# Altium PCB Biological Payload Data Consolidator.PcbDoc
Units mil, origin at the board's own origin, x right, y up, seen from the top; angles counter-clockwise.
Board outline 2500 x 2500 mil, 2 copper layers (Top Layer, Bottom Layer); 56 components, 41 nets, 213 pads, 128 vias.
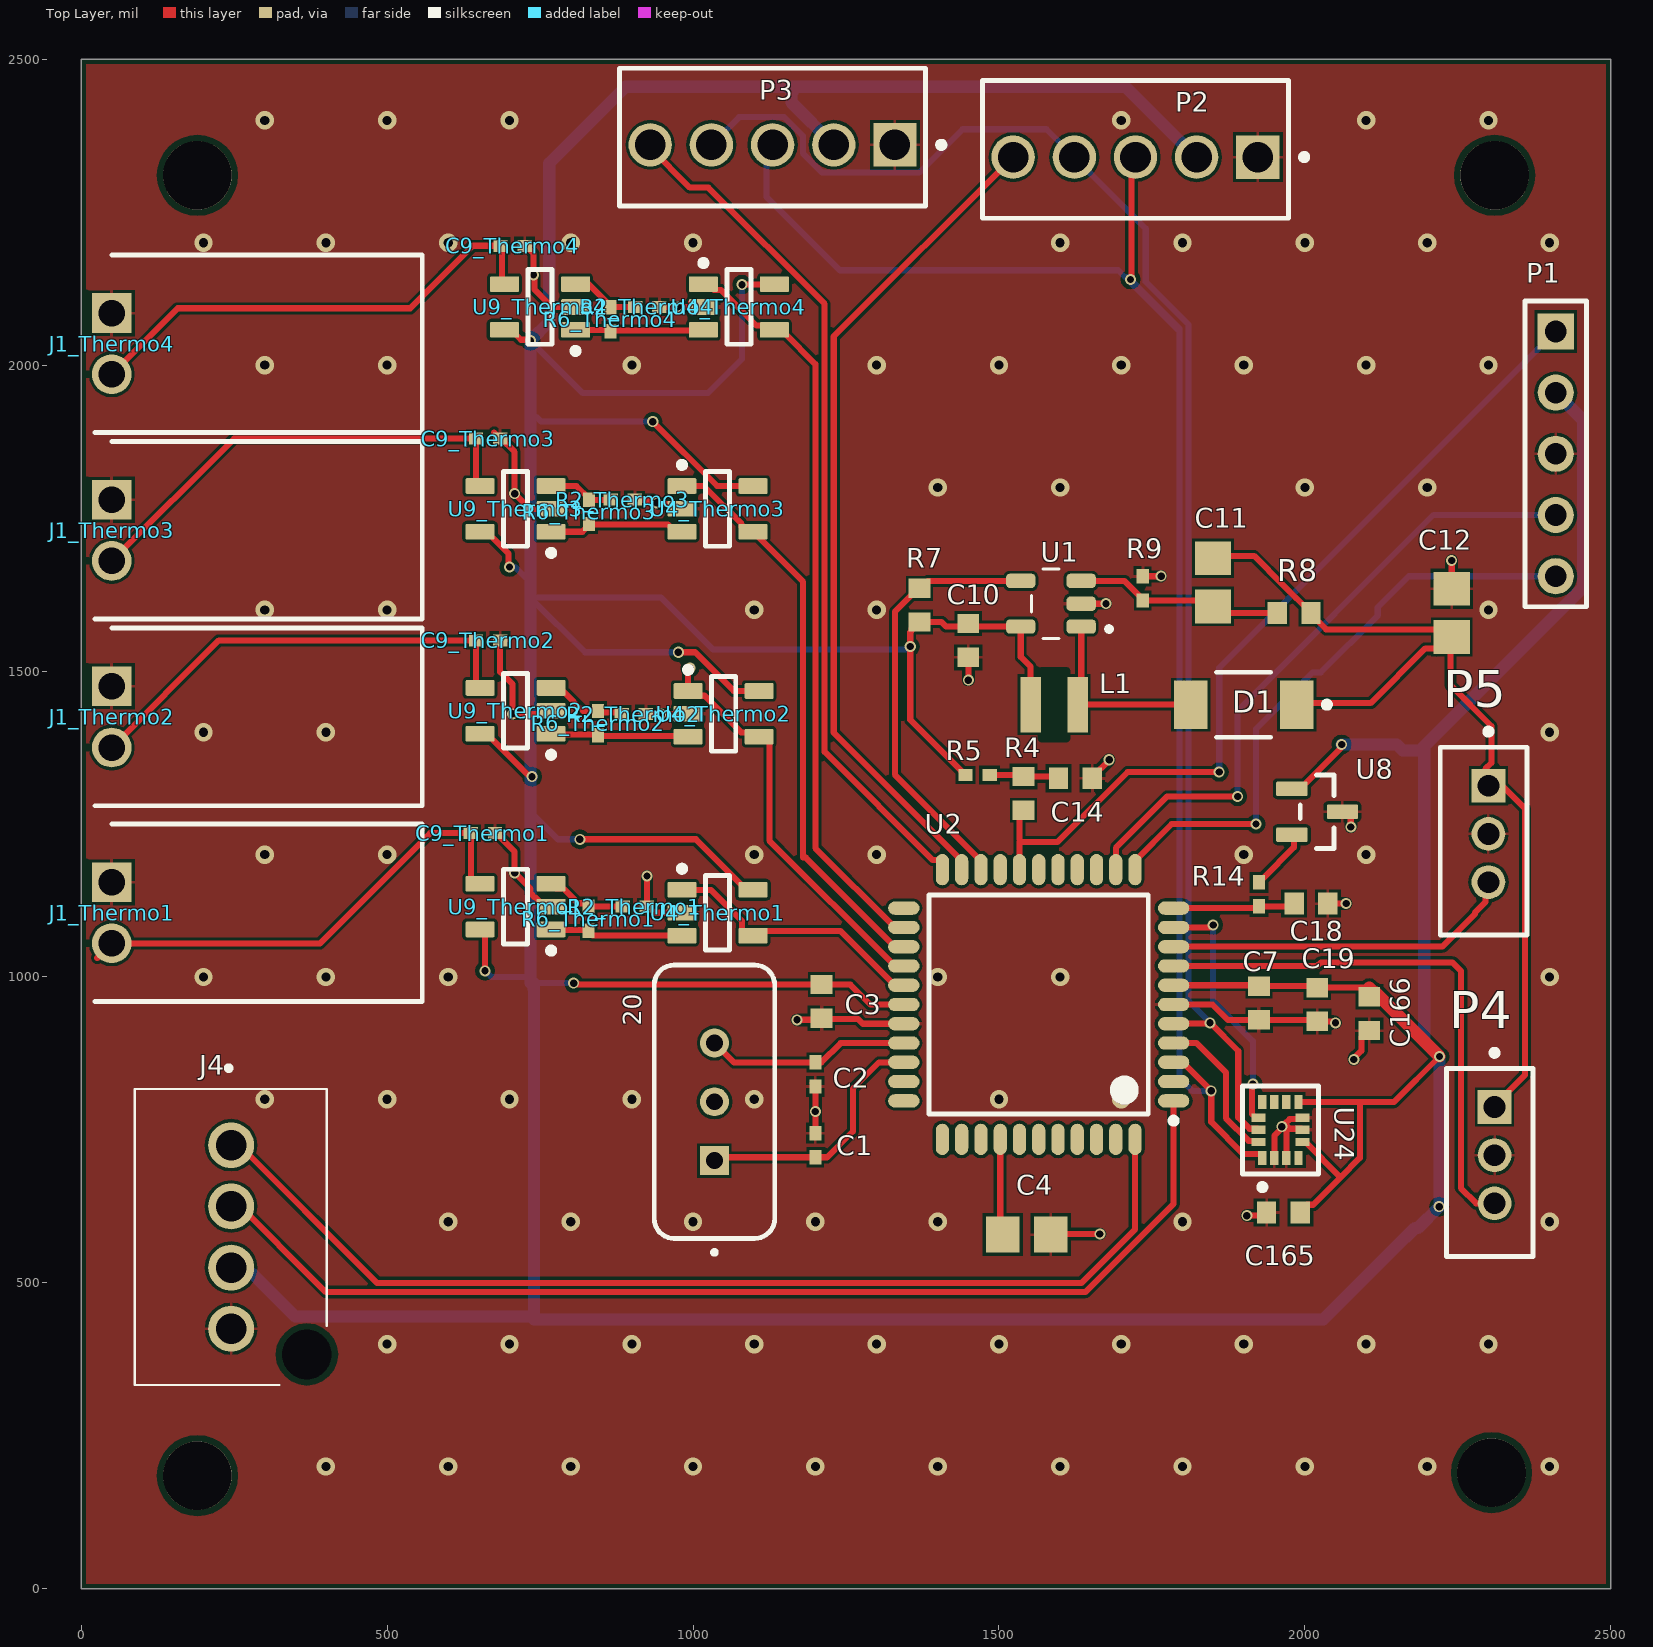
[diagram p0: Top Layer view]
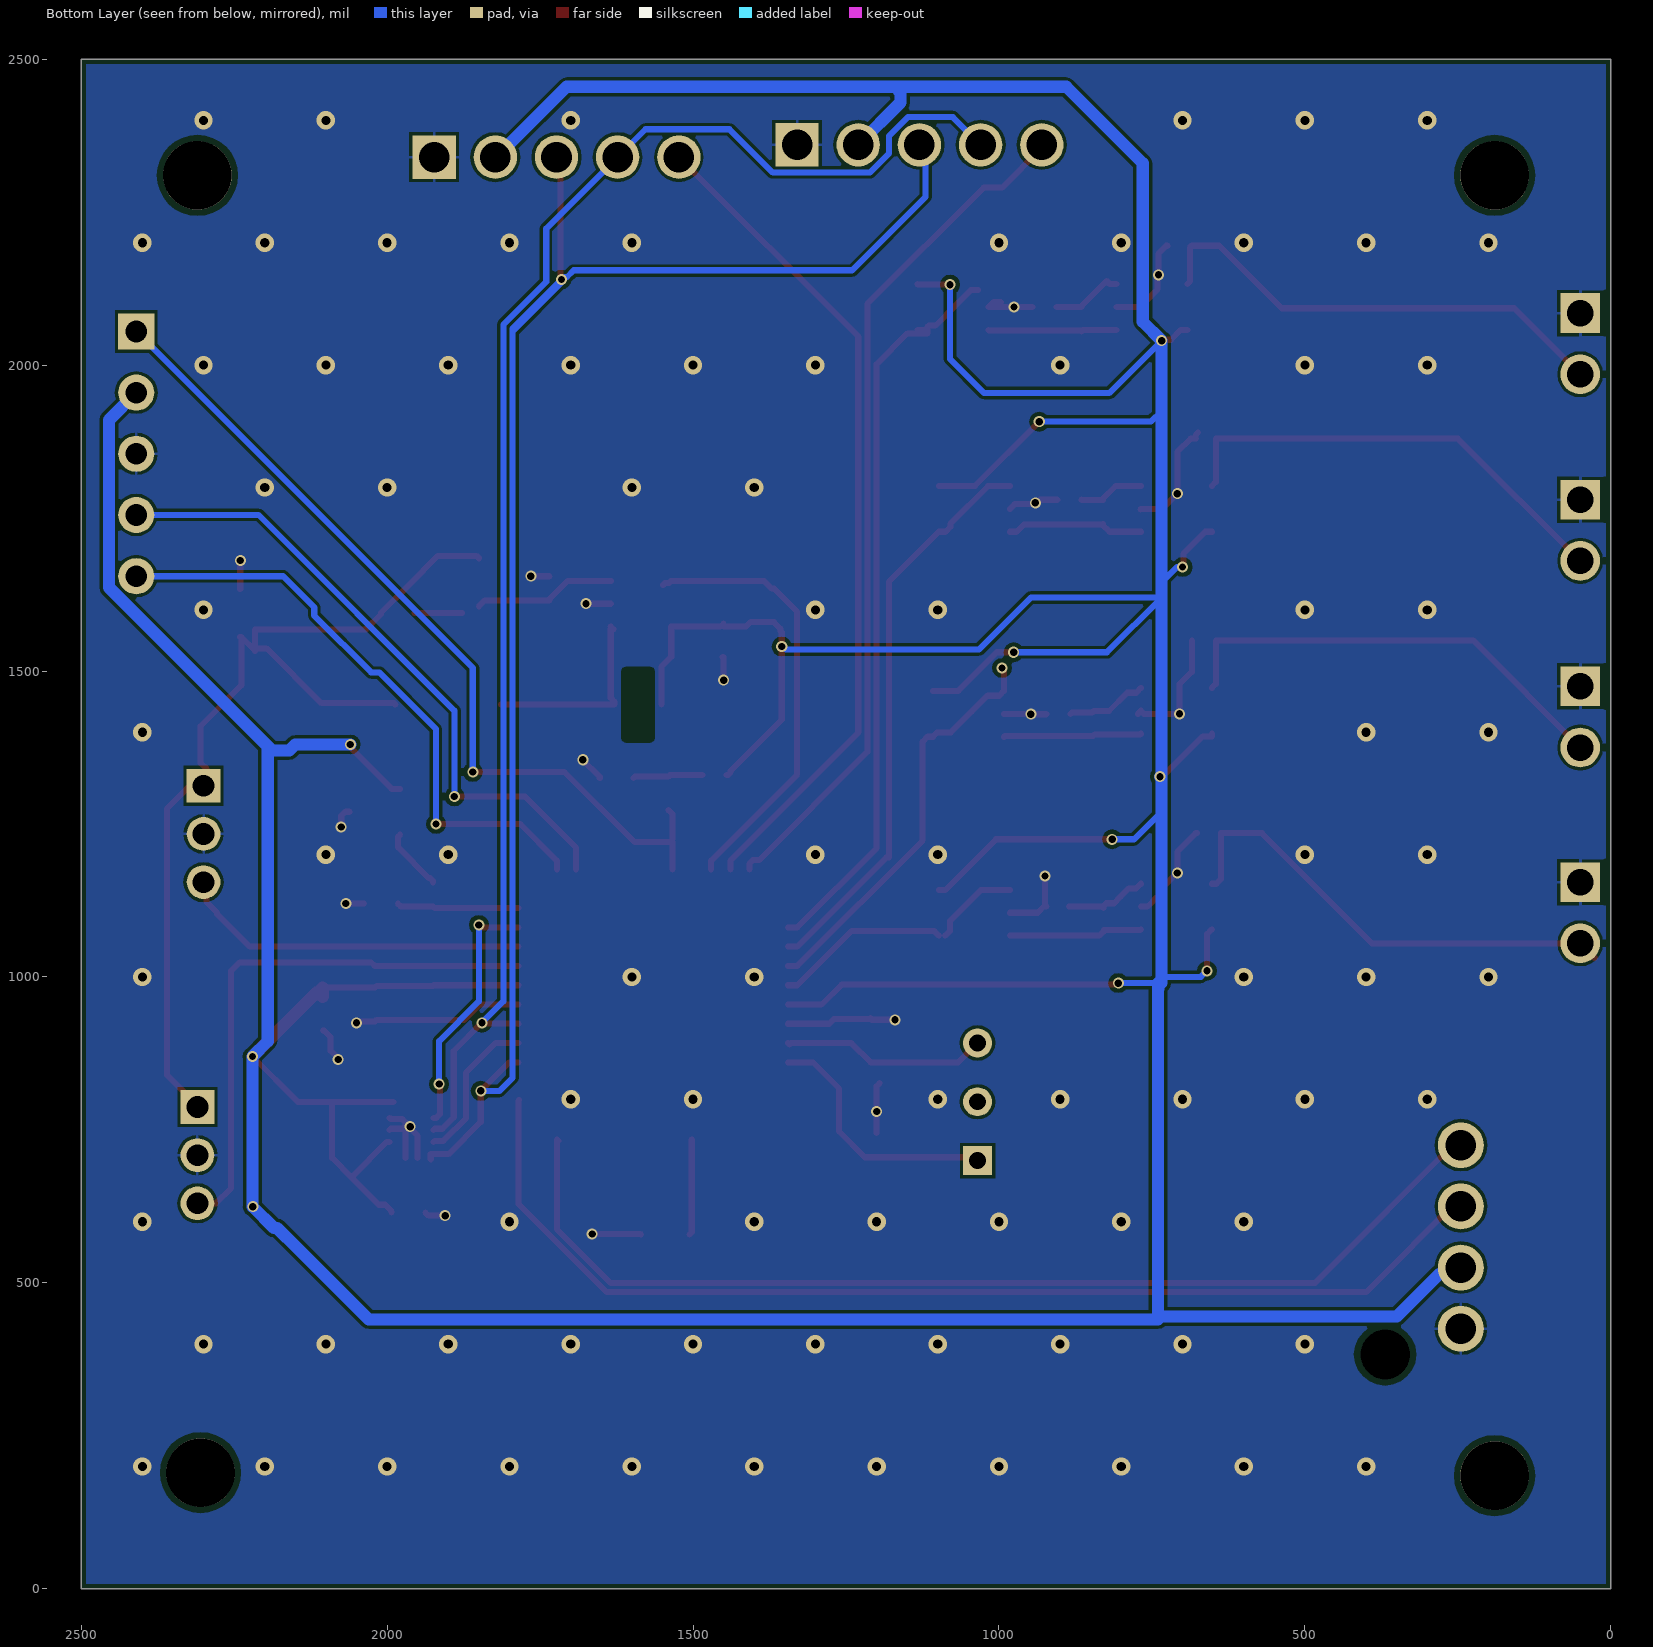
[diagram p1: Bottom Layer view, seen from below]

## Layer stack, top to bottom
Top Solder: solder mask 0.4, Solder Resist, Dk 3.5
Top Layer: signal copper 1.4
Dielectric 1: dielectric 12.6, FR-4, Dk 4.8
Bottom Layer: signal copper 1.4
Bottom Solder: solder mask 0.4, Solder Resist, Dk 3.5

## Board outline
0,0 2500,0 2500,2500 0,2500

## Design rules (kind name [scope] priority, off if disabled: settings)
BoardOutlineClearance [All] p1: gap=7.87 ignorepadtopadclearanceinfootprint=FALSE
Clearance [All] p1: gap=5 ignorepadtopadclearanceinfootprint=FALSE except(9.84: Arc-Hole Track-Hole SMDPad-Hole THPad-Hole Via-Hole Fill-Hole Poly-Hole Region-Hole Text-Hole)
ComponentClearance [All] p1: gap=5 collisioncheckmode=3 verticalgap=5 showdistances=TRUE
DiffPairsRouting [All] p1: maxlimit=10 minlimit=5 mostfreqgap=5 toplayer_minwidth=5 toplayer_maxwidth=1000 toplayer_prefwidth=5 bottomlayer_minwidth=5 bottomlayer_maxwidth=1000 bottomlayer_prefwidth=5 maxuncoupledlength=500
Height [All] p1: minheight=0 maxheight=71497.94 prefheight=500
HoleSize [All] p1: absolutevalues=TRUE maxlimit=248.03 minlimit=11.81 maxpercent=80.000 minpercent=20.000
HoleToHoleClearance [All] p1: gap=9.84 allowstackedmicrovias=FALSE
MinimumAnnularRing [All] p1: minimumring=3
MinimumSolderMaskSliver [All] p1: minsoldermaskwidth=0
PlaneClearance [All] p1: clearance=5
PlaneConnect PlaneConnectPowerPads [InPadClass('PowerPads')] p1: planeconnectstyle=Direct reliefexpansion=20 reliefentries=4 reliefconductorwidth=10 reliefairgap=10
PlaneConnect [All] p2: pad.planeconnectstyle=Relief pad.reliefexpansion=11.81 pad.reliefentries=4 pad.reliefconductorwidth=5 pad.reliefairgap=5 via.planeconnectstyle=Direct via.reliefexpansion=11.81 via.reliefentries=4 via.reliefconductorwidth=5 via.reliefairgap=5
PolygonConnect PolygonConnectPowerPads [All vs (InPadClass('PowerPads'))] p1: connectstyle=Direct reliefconductorwidth=10 reliefentries=4 polygonreliefangle="90 Angle" airgapwidth=10
PolygonConnect [All] p2: thpad.connectstyle=Relief thpad.reliefconductorwidth=5 thpad.reliefentries=4 thpad.polygonreliefangle="90 Angle" thpad.airgapwidth=5 smdpad.connectstyle=Relief smdpad.reliefconductorwidth=5 smdpad.reliefentries=4 smdpad.polygonreliefangle="90 Angle" smdpad.airgapwidth=5 via.connectstyle=Direct via.reliefconductorwidth=5 via.reliefentries=4 via.polygonreliefangle="90 Angle" via.airgapwidth=5
RoutingVias [All] p1: holewidth=11.81 width=23.62 viastyle="Through Hole" minholewidth=11.81 minwidth=23.62 maxholewidth=23.62 maxwidth=259.84
SilkToSilkClearance [All] p1: silktosilkclearance=0
SilkToSolderMaskClearance [IsPad] p1: minsilkscreentomaskgap=5 clearancetoexposedcopper=TRUE
SolderMaskExpansion [All] p1: expansion=2.95 istentingtop=FALSE
Width [All] p1: maxlimit=1000 minlimit=5 preferedwidth=5 minimp=50.000000 maximp=50.000000 favimp=50.000000
20 further rules are at their usual default settings.

## Classes and differential pairs
component class Thermo4: C9_Thermo4 J1_Thermo4 J?_Thermo4 R2_4 R2_Thermo4 R6_Thermo4 U4_Thermo4 U9_Thermo4
component class Thermo3: C9_Thermo3 J1_Thermo3 J?_Thermo3 R2_Thermo3 R6_Thermo3 U4_Thermo3 U9_Thermo3
component class Thermo2: C9_Thermo2 J1_Thermo2 J?_Thermo2 R2_Thermo2 R6_Thermo2 U4_Thermo2 U9_Thermo2
component class Thermo1: C9_Thermo1 J1_Thermo1 J?_Thermo1 R2_Thermo1 R6_Thermo1 U4_Thermo1 U9_Thermo1
channel class Thermocouple: Thermocouple1 Thermocouple2 Thermocouple3 Thermocouple4
net class THERMO[3..0]: THERMO0 THERMO1 THERMO2 THERMO3
net class LED[1..0]: LED0 LED1
component class Designator: 20 C1 C2 C3 C4 C7 C14 P1 P2 P3 R4 R5 U2
component class Boost: C10 C11 C12 D1 L1 R7 R8 R9 U1 U?

## Components (designator, comment, footprint, x,y, rotation, side; value= is the part's Value field where it differs from the comment)
20 "ECS-200-20-4X" ECS-4X-3IL 1035,796.06 r90 top
C1 "Cap" 0402-A 1200,725 r90 top value=20pF
C2 "Cap" 0402-A 1199.84,840.63 r90 top value=20pF
C3 "Cap" 1608[0603] 1210,960 r90 top value=100nF
C4 "Cap" 6-0805_M 1545.37,579 r0 top value=10uF
C7 "Cap" 1608[0603] 1925,957.44 r90 top value=100nF
C9_Thermo1 "Cap" 0402-A 656.65,1235 r180 top value=100pF (schematic designator C9)
C9_Thermo2 "Cap" 0402-A 665,1550 r180 top value=100pF (schematic designator C9)
C9_Thermo3 "Cap" 0402-A 665,1880 r180 top value=100pF (schematic designator C9)
C9_Thermo4 "Cap" 0402-A 705,2195 r180 top value=100pF (schematic designator C9)
C10 "Cap" 1608[0603] 1450,1550 r90 top value=2.2uF
C11 "Cap" 6-0805_M 1850,1645 r270 top value=510pF
C12 "Cap" 6-0805_M 2240,1595 r270 top value=4.7uF
C14 "Cap" 1608[0603] 1625,1325 r180 top value=100nF
C18 "Cap" 1608[0603] 2010,1120 r180 top value=680pF
C19 "Cap" 1608[0603] 2020,955 r90 top value=100nF
C165 "Cap" 1608[0603] 1965,615 r0 top value=100nF
C166 "Cap" 1608[0603] 2105,940 r90 top value=100nF
D1 "RSX501LAM20TR" FP-PMDTM-MFG 1900,1445 r180 top
J1_Thermo1 "0705530036" SHDRRA2W64P0X254_1X2_737X1359X699P 50,1155 r270 top (schematic designator J1)
J1_Thermo2 "0705530036" SHDRRA2W64P0X254_1X2_737X1359X699P 50,1475 r270 top (schematic designator J1)
J1_Thermo3 "0705530036" SHDRRA2W64P0X254_1X2_737X1359X699P 50,1780 r270 top (schematic designator J1)
J1_Thermo4 "0705530036" SHDRRA2W64P0X254_1X2_737X1359X699P 50,2085 r270 top (schematic designator J1)
J4 "2-644486-4" 26444864 245,725 r270 top
L1 "74438323100" "SMD 2510" 1590,1445 r180 top
P1 "Header 5" HDR1X5 2410,2055 r270 top
P2 "640456-5" TECO-640456-5 1723.14,2340 r0 top locked
P3 "640456-5" TECO-640456-5 1130,2360 r0 top locked
P4 "292161-3" TECO-292161-3_V 2310,708.74 r270 top
P5 "292161-3" TECO-292161-3_V 2300,1233.74 r270 top
R2_Thermo1 "Res1" 0402-A 905,1115 r0 top value=1k (schematic designator R2)
R2_Thermo2 "Res1" 0402-A 903.01,1429.65 r0 top value=1k (schematic designator R2)
R2_Thermo3 "Res1" 0402-A 885,1780 r0 top value=1k (schematic designator R2)
R2_Thermo4 "Res1" 0402-A 925.31,2095 r0 top value=1k (schematic designator R2)
R4 "Res1" 1608[0603] 1540,1300 r270 top value=330
R5 "Res1" 0402-A 1465,1330 r180 top value=10k
R6_Thermo1 "Res1" 0402-A 829.44,1095.5 r90 top value=1M (schematic designator R6)
R6_Thermo2 "Res1" 0402-A 845,1415 r90 top value=1M (schematic designator R6)
R6_Thermo3 "Res1" 0402-A 830,1760 r90 top value=1M (schematic designator R6)
R6_Thermo4 "Res1" 0402-A 865,2075 r90 top value=1M (schematic designator R6)
R7 "Res1" 1608[0603] 1370,1607.56 r90 top value=51k
R8 "Res1" 1608[0603] 1982.44,1595 r0 top value=51k
R9 "Res1" 0402-A 1735,1635 r90 top value=10k
R14 "Res1" 0402-A 1925,1135 r270 top value=0
U1 "LMR62014XMF/NOPD" SOT95P280X145-5N 1585,1610 r180 top
U2 "PIC18LF45K50-I/PT" MCHP-TQFP-PT44_L 1565,955 r180 top locked
U4_Thermo1 "OPA336NA/250" DBV0005A_M 1040,1105 r0 top (schematic designator U4)
U4_Thermo2 "OPA336NA/250" DBV0005A_M 1050,1430 r0 top (schematic designator U4)
U4_Thermo3 "OPA336NA/250" DBV0005A_M 1040,1765 r0 top (schematic designator U4)
U4_Thermo4 "OPA336NA/250" DBV0005A_M 1075,2095 r0 top (schematic designator U4)
U8 "TMP235AQDBZTQ1" FP-DBZ0003A-MFG 2020,1270 r0 top
U9_Thermo1 "OPA336NA/250" DBV0005A_M 710,1115 r180 top (schematic designator U9)
U9_Thermo2 "OPA336NA/250" DBV0005A_M 710,1435 r180 top (schematic designator U9)
U9_Thermo3 "OPA336NA/250" DBV0005A_M 710,1765 r180 top (schematic designator U9)
U9_Thermo4 "OPA336NA/250" DBV0005A_M 750,2095 r180 top (schematic designator U9)
U24 "LSM6DSMTR" FP-LGA-14L-DM00249496-MFG 1960,750 r90 top locked

## Footprints (in the part's own frame and the unit in brackets; to place one, negate y for a bottom-side part, rotate by r counter-clockwise, add the part's x,y. Pads: shape width x height; smd on the part's side, far side on the other; paste and mask are expansions set on the pad)
6-0805_M [mm] "Chip Resistor, Body 2.0x1.2mm, IPC Low Density"
  rect 1.4x1.5 smd: 1(-1,0) 2(1,0)
  body extent -1.07,-0.7 1.07,0.7, height 0.7
0402-A [mm] "Chip Inductor, Body 1.0x0.5mm, IPC High Density"
  rect 0.6x0.5 smd: 1(-0.5,0) 2(0.5,0)
  body extent -0.55,-0.3 0.55,0.3, height 0.55
1608[0603] [mm] "Chip Capacitor, Body 1.6x0.8mm, IPC High Density"
  rect 0.8x0.9 smd: 1(-0.7,0) 2(0.7,0)
  body extent -0.87,-0.48 0.87,0.48, height 1.3
26444864 [mm]
  round 1.905 hole 1.27: 1(0,0) 2(2.54,0) 3(5.08,0) 4(7.62,0)
  round 1.028 hole 2.057 unplated: MH1(8.687,3.15)
  silkscreen extent -3.3,-4 9.95,3.98, body extent -2.26,-3.61 10.04,4.35, height 10.21
DBV0005A_M [mm] "SOT23, 5-Leads, Body 3.05x1.75mm, Pitch 0.95mm, IPC Low Density"
  rrect15% 1.2x0.65 smd: 1(-1.475,0.95) 2(-1.475,0) 3(-1.475,-0.95) 4(1.475,-0.95) 5(1.475,0.95)
  silkscreen extent -1.6,-1.55 0.5,1.95, body extent -1.42,-1.46 1.42,1.46, height 1.08
ECS-4X-3IL [mm]
  rect 1.2x1.2 hole 0.7: 1(-2.44,0)
  round 1.2 hole 0.7: 2(0,0) 3(2.44,0)
  silkscreen extent -6.34,-2.5 5.68,2.5, body extent -5.68,-2.5 5.68,2.5, height 3.5
FP-DBZ0003A-MFG [mm]
  rrect17% 1.3x0.6 smd paste+0 mask+0: 1(-1.05,0.95) 2(-1.05,-0.95) 3(1.05,0)
  silkscreen extent -0.7,-1.52 0.7,1.52, body extent -1.8,-1.62 1.8,1.62, height 0.25
FP-LGA-14L-DM00249496-MFG [mm]
  rect 0.575x0.35 smd paste+0 mask+0: 1(-1.162,0.75) 2(-1.162,0.25) 3(-1.162,-0.25) 4(-1.162,-0.75) 8(1.162,-0.75) 9(1.162,-0.25) 10(1.162,0.25) 11(1.162,0.75)
  rect 0.35x0.575 smd paste+0 mask+0: 5(-0.5,-0.913) 6(0,-0.913) 7(0.5,-0.913) 12(0.5,0.913) 13(0,0.913) 14(-0.5,0.913)
  silkscreen extent -2.5,-1.58 1.83,1.58, body extent -2.05,-1.8 2.05,1.8, height 0.25
FP-PMDTM-MFG [mm]
  rect 1.4x2 smd paste+0 mask+0: 1(-2.2,0) 2(2.2,0)
  silkscreen extent -3.58,-1.35 1.12,1.35, body extent -3,-1.45 3,1.45, height 0.25
HDR1X5 [mm] "Connector; Header; 5 Position"
  rect 1.5x1.5 hole 0.9: 1(0,0)
  round 1.5 hole 0.9: 2(2.54,0) 3(5.08,0) 4(7.62,0) 5(10.16,0)
  silkscreen extent -1.27,-1.27 11.43,1.27
MCHP-TQFP-PT44_L [mm] "QFN, 44-Leads, Body 10x10mm, Pitch 0.8mm, IPC High Density"
  oval 1.3x0.55 smd: 1(-5.6,4) 2(-5.6,3.2) 3(-5.6,2.4) 4(-5.6,1.6) 5(-5.6,0.8) 6(-5.6,0) 7(-5.6,-0.8) 8(-5.6,-1.6) 9(-5.6,-2.4) 10(-5.6,-3.2) 11(-5.6,-4) 23(5.6,-4) 24(5.6,-3.2) 25(5.6,-2.4) 26(5.6,-1.6) 27(5.6,-0.8) 28(5.6,0) 29(5.6,0.8) 30(5.6,1.6) 31(5.6,2.4) 32(5.6,3.2) 33(5.6,4)
  oval 0.55x1.3 smd: 12(-4,-5.6) 13(-3.2,-5.6) 14(-2.4,-5.6) 15(-1.6,-5.6) 16(-0.8,-5.6) 17(0,-5.6) 18(0.8,-5.6) 19(1.6,-5.6) 20(2.4,-5.6) 21(3.2,-5.6) 22(4,-5.6) 34(4,5.6) 35(3.2,5.6) 36(2.4,5.6) 37(1.6,5.6) 38(0.8,5.6) 39(0,5.6) 40(-0.8,5.6) 41(-1.6,5.6) 42(-2.4,5.6) 43(-3.2,5.6) 44(-4,5.6)
  silkscreen extent -5.72,-4.55 4.55,4.95, body extent -5,-5 5,5, height 1.2
SHDRRA2W64P0X254_1X2_737X1359X699P [mm]
  rect 1.65x1.65 hole 1.1: 1(0,0)
  round 1.65 hole 1.1: 2(2.54,0)
  silkscreen extent -2.41,-0.7 4.95,12.89, body extent -2.41,-0.7 4.95,12.89, height 6.99
"SMD 2510" [mm] "Chip Inductor, 2-Leads, Body 2.5x2.0mm, IPC Medium Density"
  rect 0.85x2.3 smd: 1(-0.975,0) 2(0.975,0)
  body extent -1.25,-1 1.25,1, height 1
SOT95P280X145-5N [mm]
  rrect50% 1.21x0.59 smd: 1(-1.255,0.95) 2(-1.255,0) 3(-1.255,-0.95) 4(1.255,-0.95) 5(1.255,0.95)
  silkscreen extent -2.51,-1.45 0.8,1.45
TECO-292161-3_V [mm] "THD, 3-Leads, Body 7.8x3.6mm, Pitch 2 mm"
  rect 1.4x1.4 hole 0.9: 1(-2,0)
  round 1.4 hole 0.9: 2(0,0) 3(2,0)
  silkscreen extent -4.37,-2 4.2,1.6, body extent -3.6,-2 4.2,1.6, height 6.93
TECO-640456-5 [mm] "Through Hole, 5-Leads, Body 12.7x5.72mm, Pitch 2.54mm"
  rect 1.8x1.8 hole 1.27 paste+0: 1(5.08,0)
  round 1.8 hole 1.27 paste+0: 2(2.54,0) 3(0,0) 4(-2.54,0) 5(-5.08,0)
  silkscreen extent -6.35,-2.54 7.13,3.18, body extent -6.35,-2.67 6.35,3.18, height 10.29

## Part data
20: library part CMP-1669-00001-2, "CRYSTAL 20.000MHZ 20PF 49US", Manufacturer=ECS, ComponentLink1Description=Datasheet, ComponentLink1URL=http://www.ecsxtal.com/store/pdf/hc-49usx.pdf, PackageReference=4X-3IL, PartNumber=ECS-200-20-4X
C1 C2 C3 C4 C7 C9_Thermo1 C9_Thermo2 C9_Thermo3 C9_Thermo4 C10 C11 C12 C14 C18 C19 C165 C166: "Capacitor", LatestRevisionDate=17-Jul-2002, LatestRevisionNote="Re-released for DXP Platform.", PackageDescription="Radial Cap, Thru-Hole; 2 Leads; 0.3 in Pin Spacing", PackageReference=RAD-0.3, Published=8-Jun-2000, Publisher="Altium Limited"
D1: library part CMP-08971-000008-1, "DIODE SCHOTTKY 20V 5A PMDTM", Forward Current=5A, Manufacturer=Rohm, Max Junction Temp=+125°C, Max Repetitive Reverse Voltage=25V, Max Surge Forward Current=100A, Package=PMDTM, Peak Reverse Current=500uA, Reverse Voltage=20V, Temperature="to +125°C", Automotive=No, Category=Diode, ComponentLink2Description=Datasheet, ComponentLink2URL=https://fscdn.rohm.com/en/products/databook/datasheet/discrete/diode/schottky_barrier/rsx501lam20tr-e.pdf, Device Class L1="Discrete Semiconductors", Device Class L2=Diodes, Device Class L3="Schottky Diodes", Digikey Description="DIODE SCHOTTKY 20V 5A PMDTM", Height=1.05mm, Lead Free=Yes, Manufacturer Part Number=RSX501LAM20TR, Octopart=https://octopart.com/rsx501lam20tr-rohm-82270774, RoHS=TRUE, Temperature Range High=+125°C
J1_Thermo1 J1_Thermo2 J1_Thermo3 J1_Thermo4: "Connector", Manufacturer_Name=Molex, Mouser Part Number=N/A, Arrow Part Number=0705530036, Arrow Price/Stock=https://www.arrow.com/en/products/0705530036/molex, Datasheet Link=https://www.molex.com/pdm_docs/sd/705530036_sd.pdf, Height=6.99mm, Manufacturer_Part_Number=0705530036, Mouser Price/Stock=https://www.mouser.com/Search/Refine.aspx?Keyword=N%2FA
J4: "Connector", Manufacturer_Name="TE Connectivity", Mouser Part Number=571-2-644486-4, Arrow Part Number=2-644486-4, Arrow Price/Stock=https://www.arrow.com/en/products/2-644486-4/te-connectivity, Datasheet Link=http://www.te.com/commerce/DocumentDelivery/DDEController?Action=showdoc&DocId=Customer+Drawing%7F644486%7FL%7Fpdf%7FEnglish%7FENG_CD_644486_L_baseFilename.pdf%7F2-644486-4.pdf, Height=10.668mm, Manufacturer_Part_Number=2-644486-4, Mouser Price/Stock=https://www.mouser.co.uk/ProductDetail/TE-Connectivity-AMP/2-644486-4?qs=8XyASyDp%2FcDn2y5ith8QSA%3D%3D
L1: library part CMP-1411-00017-1, "Power Multilayer Inductor WE-MAPI, L=10.0µH", Inductance=10.0ÂµH, Manufacturer="Wuerth Elektronik", ComponentLink1Description="Manufacturer URL", ComponentLink1URL=http://www.we-online.com, ComponentLink2Description=Datasheet, ComponentLink2URL=http://katalog.we-online.de/kataloge/eisos/media/pdf/74438323100.pdf, PackageReference="SMD 2510", PartNumber=74438323100
P1: "Header, 5-Pin", LatestRevisionDate=17-Jul-2002, LatestRevisionNote="Re-released for DXP Platform.", Publisher="Altium Limited"
P2 P3: library part CMP-1684-00014-1, "Male Header, Pitch 2.54 mm, 1 x 5 Position, Height 10.03 mm, Tail Length 3.56 mm,  / -55 to 105 degC, RoHS, Bulk", Color=White, Current, Rating="5 /  / A", Flammability Rating=UL94V-0, Manufacturer="TE Connectivity", Package Description="Male Header, Pitch 2.54 mm, 1 x 5 Position, Height 10.03 mm, Tail Length 3.56 mm", Package Reference=THD, Temperature, Operating="-55to+105 /  / °C", Voltage, Rating="250 /  / V", Agency Approvals=CSA,UL, Angle=Straight, Brand/Series=MTA-100Series, Color, Housing=White, Connector Type=MTA-100, Contact Centerline Spacing="0.100 /  / in.", Contact Mating Area Plating=Tin, Contact Plating=Tin, Contact Shape=Square, Contact Termination Area Plating=Tin, Datasheet URL=http://sigma.octopart.com/77881742/technical_drawing/TE-Connectivity-640456-5.pdf, Datasheet Version="Rev. W3", Length, Overall="0.5 /  / \"", Length, Pin="0.14 /  / \"", Length, Terminal Post="0.14 /  / in.", Manufacturer URL=http://www.te.com, Material, Contact=CopperAlloy, Material, Housing=Polyester, Mount Angle=Vertical, Mounting Hole Size="0.04 /  / \"", Mounting Type=PCMount, Number Of Contacts=5, Number of Positions=5, Number of Rows=1, Pin Spacing="0.1 /  / \"", Primary Type=InterconnectSystem, Size, Post="0.025 /  / in.", Special Features=Pinstrip, Standards=RoHSCompliant,ELVCompliant,UL94V-0, Termination=Solder, Type=PCBPlug
P4 P5: library part CMP-2000-05551-1, "Male Header, Pitch 2 mm, 1 x 3 Position, Height 6.8 mm, Tail Length 3.2 mm, -40 to 105 degC, RoHS, Bulk", Manufacturer="TE Connectivity", Package Description="Male Header, Pitch 2 mm, 1 x 3 Position, Height 6.8 mm, Tail Length 3.2 mm", Contact Material=Brass, Contact Plating=TinPlatedContacts, Contact Termination Type=ThroughHole, Datasheet URL=http://www.te.com/commerce/DocumentDelivery/DDEController?Action=showdoc&DocId=Customer+Drawing%7F292161%7FP1%7Fpdf%7FEnglish%7FENG_CD_292161_P1.pdf%7F292161-3, Datasheet Version="Rev. P1, 06/2016", Gender=Header, Manufacturer URL=http://www.te.com/, Mounting Technology=ThroughHole, No. of Contacts=3Contacts, No. of Rows=1Rows, Package Reference=292161-3, Pitch Spacing=2mm, Product Range=AMPCTSeries, SVHC=NoSVHC(15-Jun-2015)
R2_Thermo1 R2_Thermo2 R2_Thermo3 R2_Thermo4 R4 R5 R6_Thermo1 R6_Thermo2 R6_Thermo3 R6_Thermo4 R7 R8 R9 R14: "Resistor", LatestRevisionDate=17-Jul-2002, LatestRevisionNote="Re-released for DXP Platform.", PackageDescription="Axial Device, Thru-Hole; 2 Leads; 0.3 in Pin Spacing", PackageReference=AXIAL-0.3, Published=8-Jun-2000, Publisher="Altium Limited"
U2: library part CMP-0116-01766-1, "Low-Power, High-Performance Microcontroller with XLP Technology, 48 MHz, 36 I/O, -40 to 85 degC, 44-pin TQFP (PT44), Tray", Manufacturer=Microchip, Operation Voltage Range="1.8V - 3.6V", # of A/D Channels=25, ComponentLink1Description=Datasheet, ComponentLink1URL=http://ww1.microchip.com/downloads/en/DeviceDoc/30684A.pdf, ComponentLink2Description="Package Specification", ComponentLink2URL=http://www.microchip.com/stellent/groups/techpub_sg/documents/packagingspec/en012702.pdf, ComponentLink3Description="URL Link1", ComponentLink3URL="Product URL:http://www.microchip.com/datasheet/PIC18F45K50", DatasheetVersion="Rev. A", Digital Communication="1 -A/E/USART, 1 -MSSP(SPI/I2C)", EEPROM Data Memory (bytes)=256, I/O Pins=36, Internal Oscillator="16 MHz, 31 kHz", Max. CPU Speed MHz=48, Memory Type=Flash, Mounting Technology="Surface Mount", PackageDescription="44-Lead Plastic Thin Quad Flatpack, 10 x 10 mm Body, 0.8 mm Pitch", PackageReference=TQFP-PT44, PackageVersion="C04-076B, 12/2012", Packing=TRAY, PartNumber=PIC18LF45K50-I/PT, Program Memory KBytes=32, Program Memory KWords=16, RAM=2048, Timers="2 - 8-bit, 2 - 16-bit, 0 - 32-bit"
U4_Thermo1 U4_Thermo2 U4_Thermo3 U4_Thermo4 U9_Thermo1 U9_Thermo2 U9_Thermo3 U9_Thermo4: library part CMP-0272-00910-3, "Single-Supply, MicroPower CMOS Operational Amplifier MicroAmplifier(TM) Series, 2.3 to 5.5 V, -55 to 125 degC, 5-pin SOT23 (DBV5), Green (RoHS & no Sb/Br)", Manufacturer="Texas Instruments", Total Supply Voltage(Max)(+5V is 5, +/-5V is 10)=5.5, Total Supply Voltage(Min)(+5V is 5, +/-5V is 10)=2.3, CMRR(Min)(dB)=76, Code_JEDEC=MO-178, ComponentLink1Description="Manufacturer URL", ComponentLink1URL=http://www.ti.com/, ComponentLink2Description=Datasheet, ComponentLink2URL=http://www.ti.com/general/docs/lit/getliterature.tsp?genericPartNumber=OPA336&fileType=pdf, ComponentLink3Description="Package Specification", ComponentLink3URL=http://www.ti.com/litv/pdf/mpds018i, DatasheetVersion=SBOS068C, Eco-Plan="Green (RoHS & no Sb/Br)", IIB(Max)(pA)=10, Iq per channel(Max)(mA)=0.032, Mounting Technology="Surface Mount", Number of Channels=1, Offset Drift(Typ)(uV/C)=1.5, PackageDescription="5-Pin Plastic Small Outline, Body 1.6 x 2.9 mm, Pitch 0.95 mm", PackageReference=DBV0005A, PackageVersion="4073253-4/K, 03/2006", PartNumber=OPA336NA/250, Slew Rate(Typ)(V/us)=0.03, Sub Family="Low Input Bias Current Amp (<=10pA), Low Offset Voltage Amplifier (<=500uV), Low Power Amp (<=500uA), Low Supply Voltage Amplifier (<=2.7V), Precision Amplifier", Vio (25C)(Max)(mV)=0.5, Vn at 1kHz(Typ)(nV/rtHz)=40
U8: library part CMP-04948-000003-1, "LOW-POWER HIGH-ACCURACY ANALOG O", Ambient Temperature Range High=+150°C, Ambient Temperature Range Low=-40°C, Manufacturer="Texas Instruments", Manufacturer Part Number=TMP235A2DBZR, Max Supply Voltage=5.5V, Min Supply Voltage=2.3V, Operating Supply Current=9uA, Output Current=500uA, Package=DBZ0003A, Temperature="-40°C to +150°C", Accuracy=0.5%, Automotive=No, Category=IC, ComponentLink2Description=Datasheet, ComponentLink2URL=http://www.ti.com/lit/ds/symlink/tmp235.pdf, Device Class L1=Sensors, Device Class L2="Temperature and Humidity Sensors", Device Class L3=unset, Digikey Description="LOW-POWER HIGH-ACCURACY ANALOG O", Height=1.12mm, Lead Free=Yes, Max Junction Temp=+150°C, Mouser Description="±2°C Analog output temperature sensor, with 10mV /°C gain 3-SOT-23 -40 to 150", Octopart=https://octopart.com/tmp235a2dbzr-texas+instruments-94966376, RoHS=TRUE, Sensor Output="Analog Voltage", Standoff Height=0.01mm, Temperature Range High=+150°C, Temperature Range Low=-40°C
U24: library part CMP-12177-000008-1, "IMU ACCEL/GYRO I2C/SPI 14LGA", Manufacturer=STMicroelectronics, Max Supply Voltage=3.6V, Min Supply Voltage=1.62V, Operating Supply Current=0.29-0.65mA, Package=LGA-14L-DM00249496, Temperature="-40°C to +85°C", Temperature Range High=+85°C, Temperature Range Low=-40°C, Accel Range=2/4/8/16g, Automotive=No, Category=IC, ComponentLink2Description=Datasheet, ComponentLink2URL=https://www.st.com/resource/en/datasheet/lsm6dsm.pdf, Device Class L1=Sensors, Device Class L2="Motion Sensors", Device Class L3="Inertial Measurement Units (IMUs)", Digikey Description="IMU ACCEL/GYRO I2C/SPI 14LGA", Footprint Url=https://www.st.com/content/ccc/resource/technical/document/technical_note/73/17/9c/16/dd/96/4a/01/CD00134799.pdf/files/CD00134799.pdf/jcr:content/translations/en.CD00134799.pdf, Gyro Range=125/250/500/1000/2000°/s, Height=0.86mm, Lead Free=Yes, Manufacturer Part Number=LSM6DSMTR, Mouser Description="LSM6DSM Series 3.6 V I2C/SPI 3D Accelerometer and 3D Gyroscope - LGA-14", Octopart=https://octopart.com/lsm6dsmtr-stmicroelectronics-66358194, Resolution=16bits, RoHS=TRUE, Sensor Output=I2C,SPI, Sensor Type=Temperature,Accelerometer,Gyroscope

## Free pads (board coordinates)
  round 112 hole 112 unplated: 6(190,185) 6(190,2310) 6(2305,190) 6(2310,2310)

## Via types
v1: diameter 30, hole 15, Top Layer to Bottom Layer, 84 vias
v2: diameter 18, hole 12, Top Layer to Bottom Layer, 44 vias

## Nets (pads, with @x,y where several pads share a name; then routed paths per layer and width w, separated by ;. In a path a pad name is that pad's centre, name@x,y a point inside that pad or via, vN(x,y) a via of type N, cw(c..) or ccw(c..) an arc to the next point about the centre after c; other vN are vias at no path point)
7V5: C11.1 C12.2 D1.1 P4.1 P5.1 R8.2 | length 1589.9
  Top Layer w10: C11.1 1853.77,1688.14 1916.86,1688.14 1965,1640 R8.2 ; D1.1 1989.11,1447.5 2107.5,1447.5 2196.93,1536.93 2215.47,1536.93 C12.2@2215.63,1536.77 ; R8.2@2010,1593.03 2034.89,1568.14 2215.47,1568.14 2215.63,1567.98 C12.2@2215.63,1536.77 ; C12.2 C12.2@2238.19,1555.63 ; P4.1@2315,795 2360,840 2360,1275 2295,1340 2305,1350 2305,1410 2238.19,1476.81 C12.2@2238.19,1555.63 ; C12.2@2215.63,1536.77 2215.63,1533.07 C12.2@2238.19,1555.63
CLK: P1.5 U2.12 | length 993.4
  Top Layer w10: U2.12 1722.48,1190.24 1782.24,1250 v2(1920,1250)
  Bottom Layer w10: v2(1920,1250) 1920,1405 2012.84,1497.84 2026.16,1497.84 2119,1590.69 2119,1604 2170,1655 P1.5
DAT: P1.4 U2.13 | length 1061.9
  Top Layer w10: U2.13 1690.98,1210.98 1775,1295 v2(1890,1295)
  Bottom Layer w10: v2(1890,1295) 1890,1435 2210,1755 P1.4
GND: C1.2 C2.1 C3.1 C4.2 C7.1 C9_Thermo1.1 C9_Thermo2.1 C9_Thermo3.1 C9_Thermo4.1 C10.1 C12.1 C14.1 C18.1 C19.1 C165.1 C166.1 J1_Thermo1.1 J1_Thermo2.1 J1_Thermo3.1 J1_Thermo4.1 J4.4 P1.3 P2.1 P3.1 P4.2 P5.2 R2_Thermo1.2 R2_Thermo2.2 R2_Thermo3.2 R2_Thermo4.2 R9.2 U1.2 U2.6 U2.29 U4_Thermo1.2 U4_Thermo2.2 U4_Thermo3.2 U4_Thermo4.2 U8.3 U9_Thermo1.2 U9_Thermo2.2 U9_Thermo3.2 U9_Thermo4.2 U24.2 U24.3 U24.6 U24.7 | length 2236.2
  Top Layer w10: C9_Thermo3.1@675,1889.68 677.87,1886.81 677.87,1884.84 682.72,1880 C9_Thermo3.1 ; C9_Thermo1.1 678.31,1235 708.37,1204.93 v2(708.37,1170) 734.45,1143.92 734.45,1136.59 741.43,1129.61 742.64,1129.61 757.24,1115 U9_Thermo1.2 ; C9_Thermo3.1@677.87,1880 686.65,1880 708.37,1858.28 v2(708.37,1790) 733.37,1765 U9_Thermo3.2 U9_Thermo3.2@768.79,1764.28 ; C9_Thermo2.1 684.68,1498.82 705,1478.5 v2(705,1430) 763.07,1430 U9_Thermo2.2 U9_Thermo2.2@773.07,1430 ; C9_Thermo4.1 726.65,2195 739.16,2182.5 v2(739.16,2147.58) 740.69,2146.05 740.69,2123.76 769.45,2095 U9_Thermo4.2 ; R2_Thermo3.2 933.51,1780 938.51,1775 942.84,1775 945.04,1772.8 974.13,1772.8 U4_Thermo3.2 ; R2_Thermo1.2@922.72,1115 R2_Thermo1.2@923.7,1115.98 ; R2_Thermo2.2 923.05,1429.3 v2@948.36,1429.3 ; v2(924.68,1165) 924.69,1116.97 R2_Thermo1.2@923.7,1115.98 ; R2_Thermo4.2 975.48,2095 v2(975.31,2095) U4_Thermo4.2 1009.13,2102.8 U4_Thermo4.2@997.1,2102.8 ; v2(948.01,1429.65) 948.19,1429.82 991.75,1429.82 U4_Thermo2.2 ; U4_Thermo1.2 936.65,1105 925.67,1115.98 R2_Thermo1.2@923.7,1115.98 ; v2(1170,930) 1207.56,930 C3.1 1210.93,931.51 1269.55,931.51 1277.55,923.5 U2.29 ; C2.1@1195,826.53 C2.1@1199.84,821.69 ; C2.1 1199.92,820.87 1199.92,780.08 v2(1200,780) C1.2 ; v2(1450,1485) C10.1 C10.1@1451.97,1522.44 ; C4.2 1585.75,580 v2(1665,580) ; U1.2 v2(1675,1610) ; C14.1 1652.56,1326.97 1680,1354.41 v2(1680,1355) ; R9.2 1735.16,1654.84 1764.84,1654.84 v2(1765,1655) ; U2.6 1848.94,955 1874.06,929.88 C7.1 2017.56,929.88 C19.1 2047.56,927.44 v2(2050,925) ; v2(1905,610) 1932.44,610 C165.1 ; U24.2 1950.16,740.83 1962.37,753.04 v2(1962.37,755.21) v2@1967.16,760 ; U24.3 1970,704.39 v2@1970,754.89 ; U24.6 1994.04,751.89 1975.28,751.89 v2@1967.16,760 ; U24.7 1994.04,767.8 1974.96,767.8 v2@1967.16,760 ; C18.1 v2(2067.56,1120) ; U8.3 2068.19,1270 2075,1263.19 v2(2075,1245) ; v2(2080,865) 2080,867.16 2092.28,879.45 2092.28,901.69 2103.03,912.44 C166.1 ; C12.1 v2(2240,1680.63)
  other v1: 400,200 600,200 800,200 1000,200 1200,200 1400,200 1600,200 1800,200 2000,200 2200,200 2400,200 500,400 700,400 900,400 1100,400 1300,400 1500,400 1700,400 1900,400 2100,400 2300,400 600,600 800,600 1000,600 1200,600 1400,600 1800,600 2400,600 300,800 500,800 700,800 900,800 1100,800 1500,800 1700,800 200,1000 400,1000 600,1000 1400,1000 1600,1000 2400,1000 300,1200 500,1200 1100,1200 1300,1200 1900,1200 2100,1200 200,1400 400,1400 2400,1400 300,1600 500,1600 1100,1600 1300,1600 2300,1600 1400,1800 1600,1800 2000,1800 2200,1800 300,2000 500,2000 900,2000 1300,2000 1500,2000 1700,2000 1900,2000 2100,2000 2300,2000 200,2200 400,2200 600,2200 800,2200 1000,2200 1600,2200 1800,2200 2000,2200 2200,2200 2400,2200 300,2400 500,2400 700,2400 1700,2400 2100,2400 2300,2400
  other v2: 940.67,1775
LED0: P5.3 U2.9 | length 558.7
  Top Layer w10: U2.9 2224.49,1049.49 2277.88,1102.88 2277.88,1105.29 2295,1122.41 P5.3@2295,1140
LED1: P4.3 U2.8 | length 898
  Top Layer w10: U2.8 2020.5,1017.99 2026.31,1023.81 2241.19,1023.81 2255,1010 2255,655 2280,630 P4.3
MCLR: P1.1 R4.2 U2.18 | length 1417
  Top Layer w10: U2.18 1533.5,1220.71 1595.87,1220.71 1710.17,1335 v2(1860,1335) ; 1533.5,1225 1533.5,1265.94 R4.2
  Bottom Layer w10: v2(1860,1335) 1860,1505 P1.1
Net20_1: 20.1 C1.1 U2.31 | length 417
  Top Layer w10: 20.1 1040.32,705.32 C1.1 1218.98,705.32 1261.46,747.79 1261.46,817.78 1303.94,860.26 1344.27,860.26 U2.31
Net20_3: 20.3 C2.2 U2.30 | length 337.5
  Top Layer w10: 20.3 1066.81,860.31 C2.2 1209.69,860.31 1241.38,892.01 1340.51,892.01 1342.52,890 U2.30
NetC4_1: C4.1 U2.37 | length 157.2
  Top Layer w10: U2.37 1502.01,582.99 C4.1
NetC9_Thermo1_2: C9_Thermo1.2 J1_Thermo1.2 U9_Thermo1.4 | length 788.2
  Top Layer w10: 26.2,1031.2 47.5,1052.5 J1_Thermo1.2 390.36,1055 570.36,1235 C9_Thermo1.2 636.97,1160.2 644.76,1152.4 U9_Thermo1.4
NetC9_Thermo2_2: C9_Thermo2.2 J1_Thermo2.2 U9_Thermo2.4 | length 748.1
  Top Layer w10: J1_Thermo2.2 225,1550 C9_Thermo2.2 645.31,1479.02 U9_Thermo2.4
NetC9_Thermo3_2: C9_Thermo3.2 J1_Thermo3.2 U9_Thermo3.4 | length 758.5
  Top Layer w10: J1_Thermo3.2 250,1880 C9_Thermo3.2 645.31,1809.02 U9_Thermo3.4
NetC9_Thermo4_2: C9_Thermo4.2 J1_Thermo4.2 U9_Thermo4.4 | length 787.6
  Top Layer w10: J1_Thermo4.2 157.84,2092.84 537.84,2092.84 640,2195 C9_Thermo4.2 687.94,2192.37 687.94,2136.39 U9_Thermo4.4
NetC11_2: C11.2 R8.1 R9.1 U1.3 | length 311.5
  Top Layer w10: U1.3 1704.88,1647.4 1735,1617.28 R9.1 1840.31,1615.32 C11.2 ; C11.2@1877.46,1595 R8.1
NetC14_2: C14.2 R4.1 R5.1 | length 114.8
  Top Layer w10: R5.1 1537.56,1330 R4.1 1594.88,1327.56 C14.2
NetD1_2: D1.2 L1.1 U1.1 | length 316.9
  Top Layer w10: U1.1@1630.12,1568.31 U1.1 ; U1.1@1634.41,1568.31 1634.41,1456.02 1628.39,1450 L1.1 D1.2
NetJ4_1: J4.1 U2.44 | length 1762.7
  Top Layer w10: J4.1@245,738.43 483.43,500 1635,500 1722.48,587.48 U2.44 U2.44@1720.25,732.3
NetJ4_2: J4.2 U2.1 | length 1834.4
  Top Layer w10: J4.2@245,640 400,485 1641.21,485 1785.47,629.26 U2.1 U2.1@1784.23,798.76
NetP2_3: P2.3 P3.3 U2.3 U24.1 | length 2719.2
  Top Layer w10: v2(1715,2140) 1716.53,2141.53 1716.53,2333.39 P2.3 ; U2.3 1800.24,860.51 v2(1846.92,813.83) 1846.92,763.08 1899.45,710.55 1928.58,710.55 U24.1@1928.58,702.03
  Bottom Layer w10: P3.3 1120,2350 1120,2275 1240,2155 1695,2155 1706,2144 1708.84,2144 1712.5,2140.34 1712.5,2137.5 1795,2055 ; v2(1715,2140) 1795,2060 1795,2055 ; P2.3@1723.14,2323.43 P2.3 ; v2(1846.92,813.83) 1816.17,813.83 1795,835 1795,2055
NetR2_Thermo1_1: R2_Thermo1.1 R6_Thermo1.2 U9_Thermo1.3 | length 135.7
  Top Layer w10: U9_Thermo1.3 775.87,1144.61 787.9,1144.61 801.69,1130.81 811.95,1120.56 824.6,1120.56 829.44,1115.72 829.44,1113.22 831.22,1115 R2_Thermo1.1
NetR2_Thermo2_1: R2_Thermo2.1 R6_Thermo2.2 U9_Thermo2.3 | length 133
  Top Layer w10: U9_Thermo2.3 775.87,1464.61 790.24,1464.61 820.16,1434.69 R6_Thermo2.2 847.52,1432.17 880.81,1432.17 R2_Thermo2.1
NetR2_Thermo3_1: R2_Thermo3.1 R6_Thermo3.2 U9_Thermo3.3 | length 107.9
  Top Layer w10: U9_Thermo3.3 809.25,1802.4 830,1781.65 R6_Thermo3.2 ; R6_Thermo3.2@830,1779.84 865.16,1779.84 R2_Thermo3.1
NetR2_Thermo4_1: R2_Thermo4.1 R6_Thermo4.2 U9_Thermo4.3 | length 118.8
  Top Layer w10: U9_Thermo4.3 818.9,2132.4 824.07,2137.58 865,2096.65 R6_Thermo4.2 865.16,2094.84 905.47,2094.84 R2_Thermo4.1
NetR6_Thermo1_1: R6_Thermo1.1 U4_Thermo1.3 U9_Thermo1.1 | length 219.2
  Top Layer w10: U9_Thermo1.1 768.96,1076.71 828.55,1076.71 R6_Thermo1.1 829.44,1073.85 835.69,1067.6 U4_Thermo1.3
NetR6_Thermo2_1: R6_Thermo2.1 U4_Thermo2.3 U9_Thermo2.1 | length 225.9
  Top Layer w10: U9_Thermo2.1 769.21,1396.46 843.86,1396.46 846.36,1393.96 990.57,1393.96 U4_Thermo2.3
NetR6_Thermo3_1: R6_Thermo3.1 U4_Thermo3.3 U9_Thermo3.1 | length 226.1
  Top Layer w10: U9_Thermo3.1 819.25,1727.6 830,1738.35 R6_Thermo3.1 830,1739.33 959.37,1739.33 971.1,1727.6 U4_Thermo3.3
NetR6_Thermo4_1: R6_Thermo4.1 U4_Thermo4.3 U9_Thermo4.1 | length 210.7
  Top Layer w10: U9_Thermo4.1 862.72,2057.6 R6_Thermo4.1 866.14,2056.46 1015.79,2056.46 U4_Thermo4.3
NetR7_2: R7.2 U1.4 U2.20 | length 716.6
  Top Layer w10: U2.20 1470.51,1190.24 1330,1330.75 1330,1597.09 1368.03,1635.12 R7.2 1371.97,1635.12 1384.25,1647.4 U1.4 ; U1.4@1539.41,1643.58 1545.87,1643.58 U1.4@1548.6,1640.85
NetR14_1: R14.1 U8.2 | length 104
  Top Layer w10: R14.1 1925,1156.65 1929.84,1161.5 1931.81,1161.5 1981.96,1211.65 1981.96,1229.3 U8.2
NetU2_4: U2.4 U24.14 | length 249.4
  Top Layer w10: U2.4 1822.99,892.01 1870.92,844.08 1870.92,769.27 1907.99,732.2 1922.18,732.2 U24.14
SCK: P2.4 P3.4 U2.5 U24.13 | length 2496.7
  Top Layer w10: U2.5 1786.22,924.25 1844.25,924.25 v2(1845,925) 1891,879 1891,770.41 1909.52,751.89 1922.18,751.89 U24.13
  Bottom Layer w10: P3.4 1075.43,2405.43 1148.82,2405.43 1180,2374.25 1180,2345.75 1211.18,2314.57 1369.58,2314.57 1440.44,2385.43 1577.71,2385.43 P2.4 1740,2223.14 1740,2136.21 1810,2066.21 1810,960 v2(1845,925)
"SS 1": P2.5 U2.21 | length 1372.5
  Top Layer w10: U2.21 1439.02,1190.24 1230,1399.25 1230,2046.86 P2.5
"SS 2": P3.5 U2.22 | length 1405.9
  Top Layer w10: P3.5 930,2355 995,2290 1025,2290 1215,2100 1215,1367.99 1391.88,1191.12 1402.14,1191.12 1407.52,1185.73 U2.22
"SS ACC": U2.10 U24.12 | length 416
  Top Layer w10: U2.10 1843.82,1080.98 1847.84,1085 v2(1850,1085) ; v2(1915,825) 1913.58,823.58 1913.58,775.75 1919.65,769.68 U24.12
  Bottom Layer w10: v2(1850,1085) 1850,960 1915,895 v2(1915,825)
THERMO0: U2.27 U4_Thermo1.1 U4_Thermo1.4 | length 432.5
  Top Layer w10: U4_Thermo1.1 1029.16,1142.4 1079.96,1091.61 1079.96,1075.39 U4_Thermo1.4@1087.75,1067.6 ; U4_Thermo1.4 1105.47,1075 1241.26,1075 1329.76,986.5 U2.27
THERMO1: U2.26 U4_Thermo2.1 U4_Thermo2.4 | length 672.4
  Top Layer w10: v2(995,1505) 991.93,1501.93 U4_Thermo2.1 999.72,1459.61 1018.83,1459.61 1044.14,1434.3 1078.7,1399.73 1100.93,1399.73 U4_Thermo2.4 1116.98,1392.6 1124.77,1384.8 1124.77,1222.98 1329.76,1017.99 U2.26
THERMO2: U2.25 U4_Thermo3.1 U4_Thermo3.4 | length 941.5
  Top Layer w10: U4_Thermo3.1 1017.64,1802.4 1079.45,1740.59 1079.45,1735.39 1087.24,1727.6 U4_Thermo3.4 1180,1645.67 1180,1195 1184.25,1195 1329.76,1049.49 U2.25
THERMO3: U2.24 U4_Thermo4.1 U4_Thermo4.4 | length 1230.2
  Top Layer w10: U4_Thermo4.1@1034.28,2122.8 1045.64,2122.8 1070.04,2098.39 1103.7,2064.73 1114.45,2064.73 1116.54,2062.64 U4_Thermo4.4@1116.54,2051.89 ; U4_Thermo4.4 1122.24,2057.6 U4_Thermo4.4@1116.54,2051.89 ; U2.24 1329.76,1080.98 1200,1210.75 1200,2001.5 1149.6,2051.89 U4_Thermo4.4@1116.54,2051.89
TMPOUT: C18.2 R14.2 U2.11 | length 200.1
  Top Layer w10: U2.11 1922.17,1112.48 R14.2 1977.76,1115.31 C18.2
VDD: C3.2 C7.2 C10.2 C19.2 C165.2 C166.2 J4.3 L1.2 P1.2 P2.2 P3.2 R5.2 R7.1 U1.5 U2.7 U2.28 U4_Thermo1.5 U4_Thermo2.5 U4_Thermo3.5 U4_Thermo4.5 U8.1 U9_Thermo1.5 U9_Thermo2.5 U9_Thermo3.5 U9_Thermo4.5 U24.5 U24.8 | length 12264.8
  Top Layer w10: J4.3@245,540 J4.3@245,541.57 ; U9_Thermo1.5 652.2,1077.6 660,1069.8 v2(660,1010) ; U9_Thermo2.5 651.93,1393.07 667.28,1393.07 v2@735.35,1325 ; U9_Thermo3.5 662.76,1727.6 698.47,1691.89 698.47,1671.53 v2(700,1670) ; U9_Thermo4.5 702.76,2057.6 718.82,2041.53 732.68,2041.53 v2(734.22,2040) ; v2@810,990 812.44,987.56 C3.2 1257.27,987.56 1289.83,955 U2.28 ; v2@818.7,1225 1004.65,1225 1087.24,1142.4 U4_Thermo1.5 ; v2(934.16,1907.58) 1039.33,1802.4 U4_Thermo3.5 ; v2(975.86,1530.7) 1003.24,1530.7 1066.54,1467.4 U4_Thermo2.5 ; v2(1079.96,2131.61) 1080.35,2132.01 1132.67,2132.01 U4_Thermo4.5 ; P3.2@1228.43,2355.07 1228.43,2360 P3.2@1237.43,2369 ; R5.2 1443.35,1330 1438.5,1334.84 1438.5,1336.81 1355,1420.31 v2(1355,1540) 1355,1563.39 1357.28,1565.68 1357.28,1569.25 1368.03,1580 R7.1 1406.28,1580 1413.72,1572.56 C10.2@1450,1572.56 ; C10.2 1454.96,1572.6 U1.5 1535.59,1523.24 1551.61,1507.22 1551.61,1450 L1.2 ; U2.7 1923.5,986.5 C7.2 2017.56,985 C19.2 C166.2@2105,982.56 ; U8.1 1992.44,1307.4 2058.47,1373.43 2058.47,1378.47 v2(2060,1380) ; U24.8 2090,795.77 ; C165.2 1992.56,616.97 2003.31,627.72 2013.46,627.72 2057.87,672.13 ; U24.5 2000.35,730.32 2057.87,672.8 2057.87,672.13 ; v2(2220,870) 2145.77,795.77 2090,795.77 ; 2057.87,672.13 2090,704.25 2090,795.77
  Top Layer w20: v2(2220,870) 2114.7,975.3 2112.26,975.3 2105,982.56 C166.2@2105,975.3 ; C166.2@2105,975.3 C166.2 C166.2@2105,975.3
  Bottom Layer w10: v2(660,1010) 670,1000 734.22,1000 ; v2(700,1670) 709.22,1670 734.22,1645 ; 734.22,980 740,980 ; 734.22,990 740,990 v2(805,990) ; 734.22,1270 779.22,1225 v2(815,1225) ; 734.22,1925 751.64,1907.58 v2(934.16,1907.58) ; v2(734.22,2040) 820,1954.21 1024.21,1954.21 1079.96,2009.96 v2(1079.96,2131.61) ; v2(975.86,1530.7) 823.51,1530.7 734.22,1620 947.89,1620 1032.89,1535 1347.84,1535 1351.3,1538.47 1352.84,1538.47 1354.37,1540 v2(1355,1540)
  Bottom Layer w20: J4.3 255.52,514.48 280.52,514.48 350,445 740,445 ; 734.22,990 734.22,1000 734.22,1270 v2@734.22,1327.4 ; v2(736.93,1327.4) v2@734.22,1327.4 ; 740,440 740,980 740,990 ; 745,440 2030,440 2145,555 2179.75,589.75 2184.75,589.75 v2(2219.5,624.5) 2220,625 v2(2220,870) 2195,895 2195,1377.03 ; P3.2 1160.78,2429.22 1160.78,2445.78 1170,2455 ; P2.2 1821.57,2340 1706.57,2455 1170,2455 ; v2(2060,1380) 2150,1380 2160,1370 2187.97,1370 2454.53,1636.56 2454.53,1910.47 P1.2 ; v2@734.22,1327.4 734.22,1620 734.22,1645 734.22,1925 v2(734.22,2040) 765,2070.78 765,2330 890,2455 1160.78,2455 1170,2455
pads on no net: 20.2 J4.MH1 U2.2 U2.14 U2.15 U2.16 U2.17 U2.19 U2.23 U2.32 U2.33 U2.34 U2.35 U2.36 U2.38 U2.39 U2.40 U2.41 U2.42 U2.43 U24.4 U24.9 U24.10 U24.11

## Polygon pours and split planes (outlines as drawn)
GND on Bottom Layer "GND_L02_P000" (solid, pour order 0): 0,0 2500,0 2500,2500 0,2500
GND on Top Layer "GND_L01_P001" (solid, pour order 1): 0,2500 2500,2500 2500,0 0,0